# Altium PCB Hedgehog.PcbDoc
Units mm, origin at the board's own origin, x right, y up, seen from the top; angles counter-clockwise.
Board outline 90 x 75 mm, 2 copper layers (Top Layer, Bottom Layer); 72 components, 60 nets, 226 pads, 276 vias.
Unrouted connection lines stored in the file: 5.
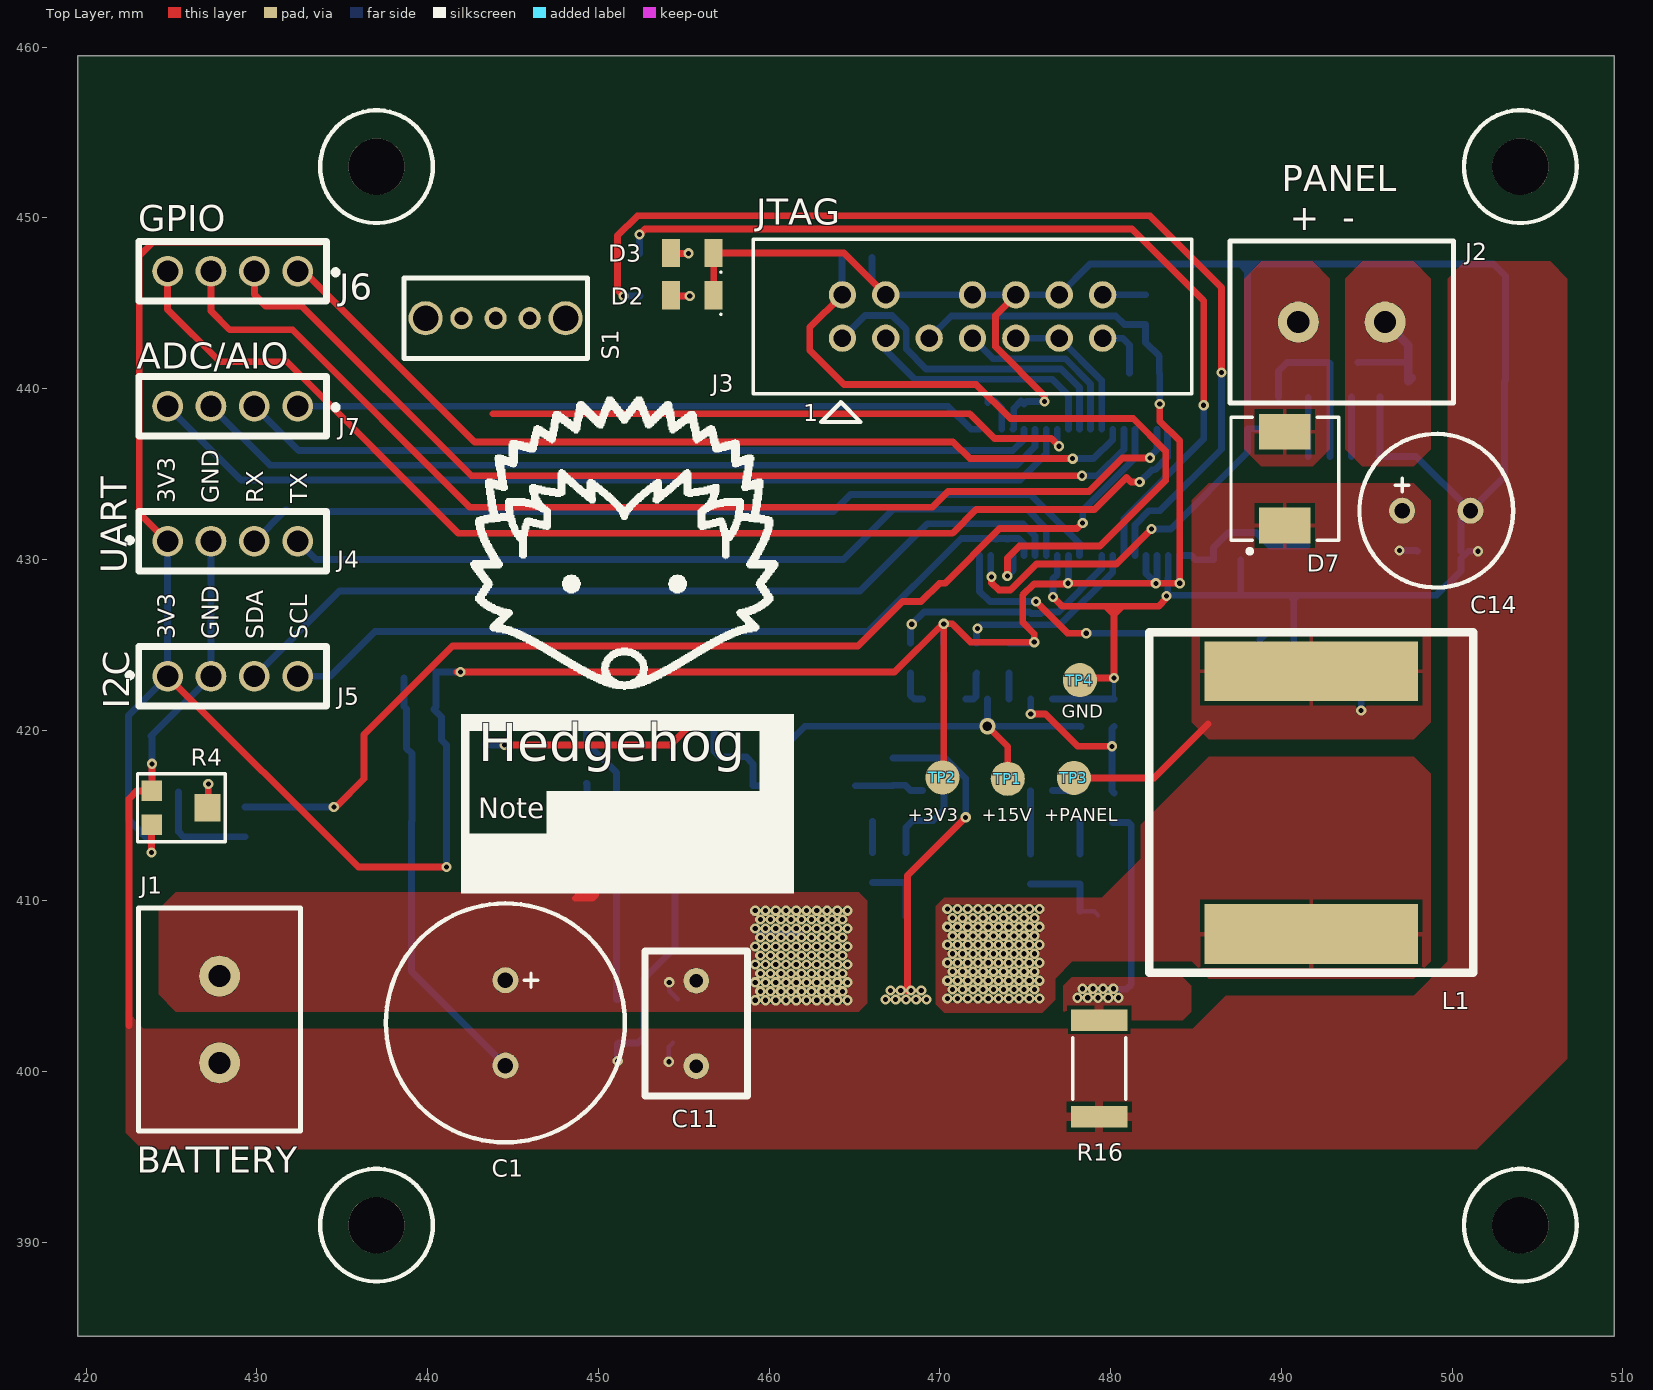
[diagram p0: Top Layer view]
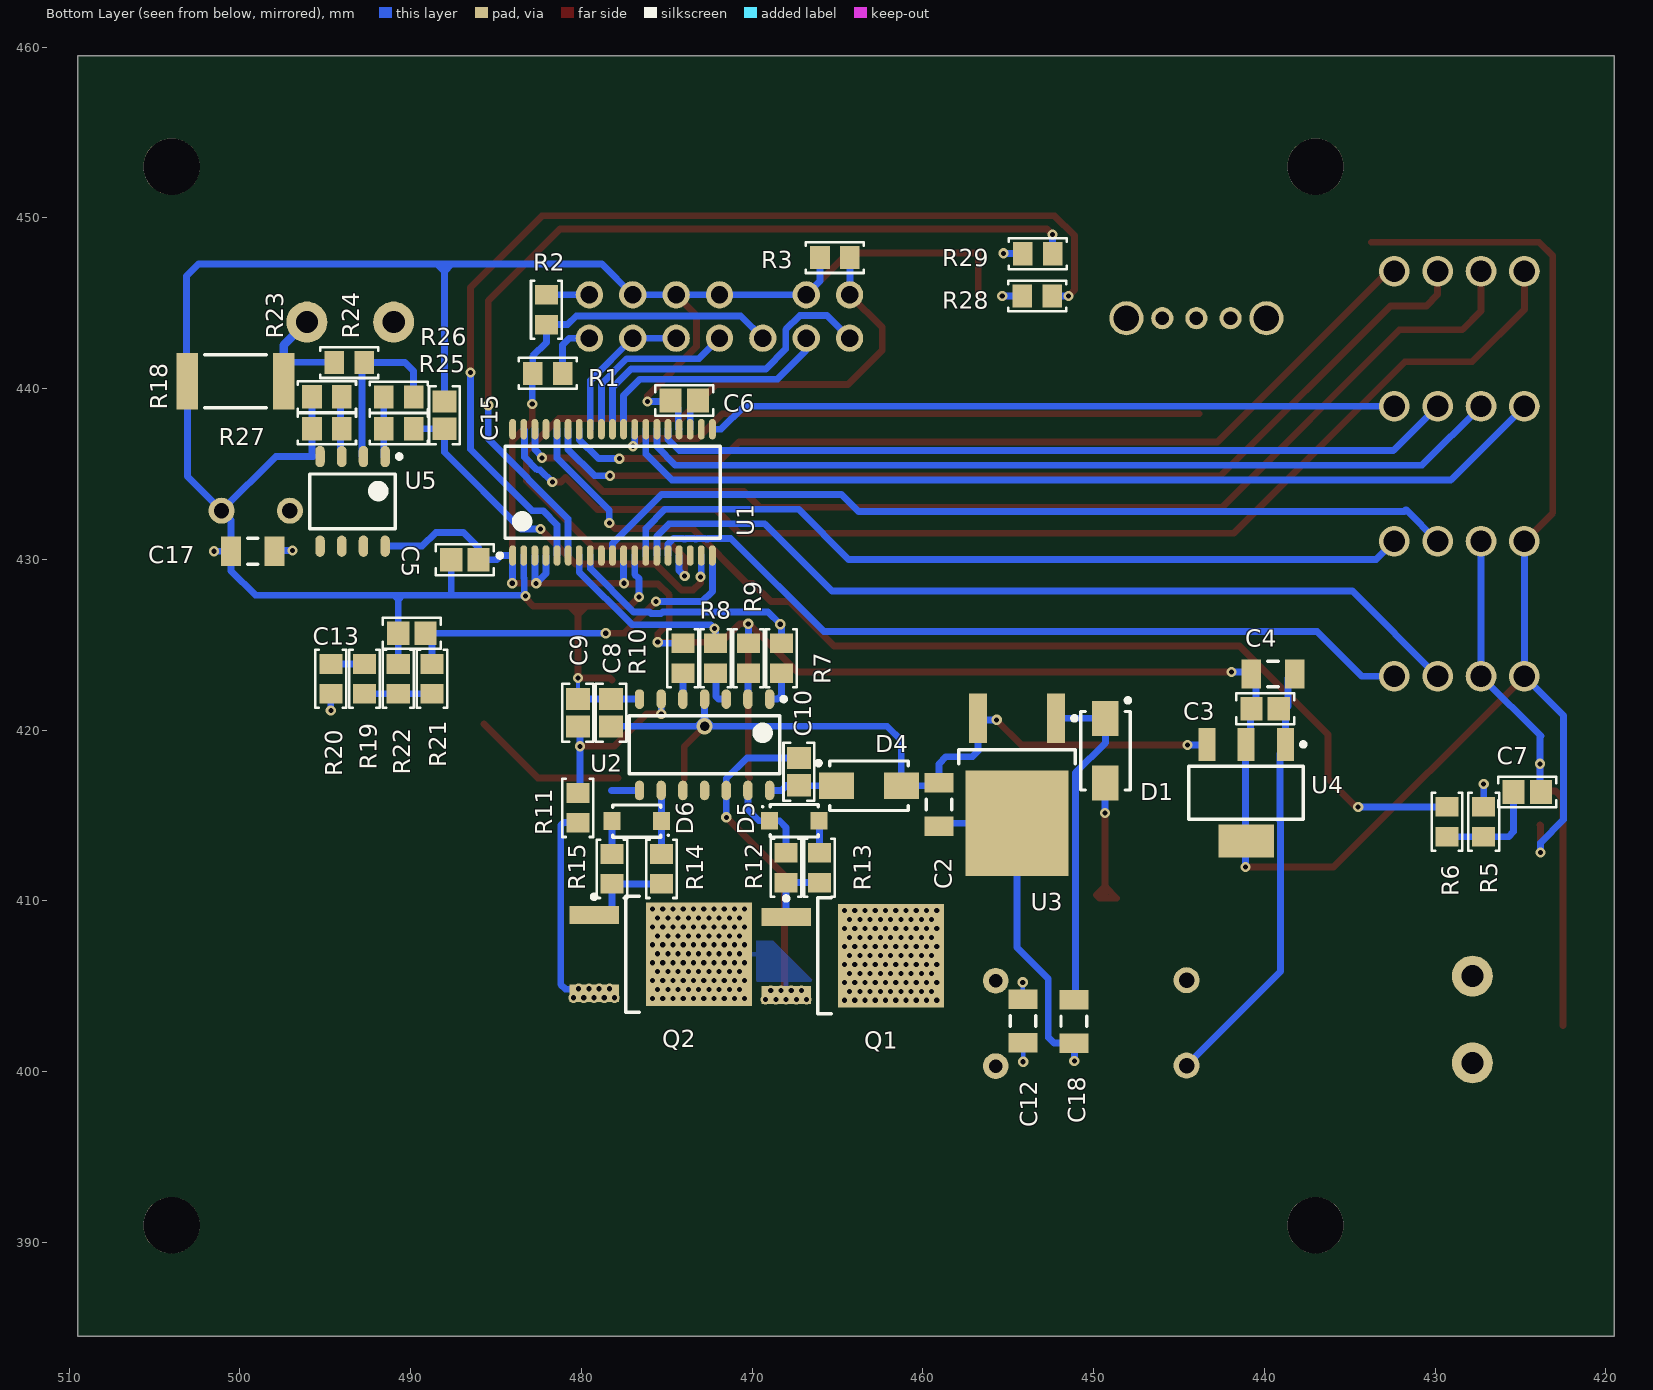
[diagram p1: Bottom Layer view, seen from below]
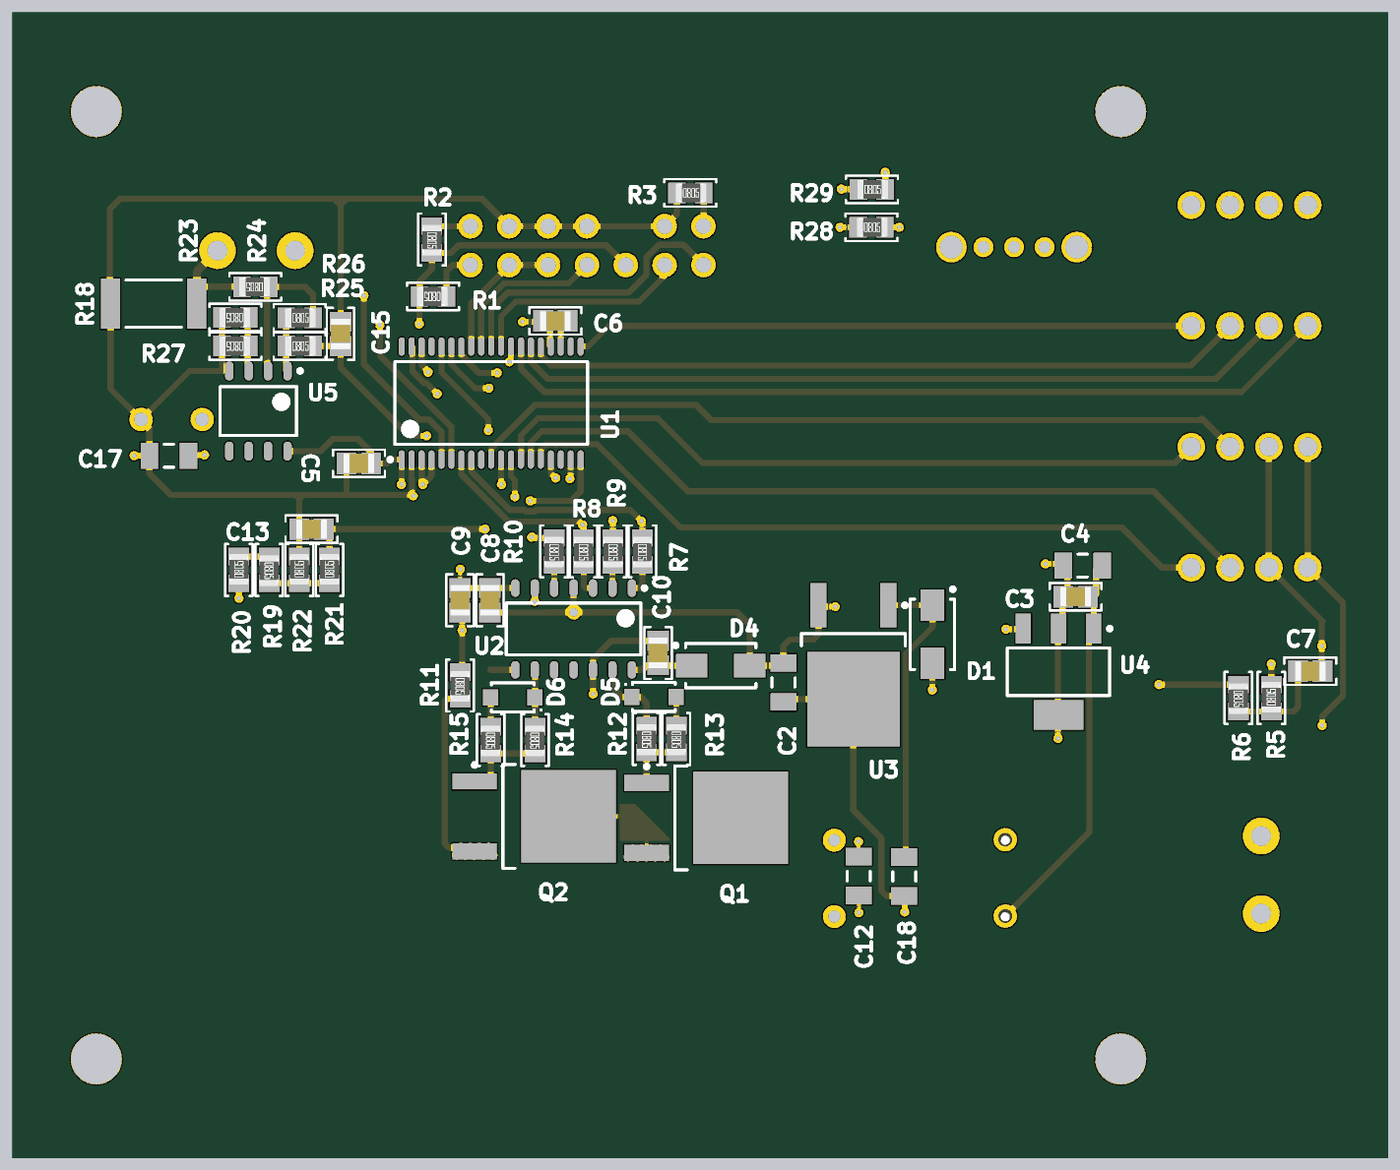
[diagram p2: 3D render of the assembled board from below, using the file's embedded part models]

## Layer stack, top to bottom
Top Solder: solder mask 0.0102, Solder Resist, Dk 3.5
Top Layer: signal copper 0.0356
Dielectric 1: dielectric 0.32, FR-4, Dk 4.8
Bottom Layer: signal copper 0.0356
Bottom Solder: solder mask 0.0102, Solder Resist, Dk 3.5

## Board outline
419.5,384.5 509.5,384.5 509.5,459.5 419.5,459.5

## Design rules (kind name [scope] priority, off if disabled: settings)
Clearance [All] p1: gap=0.2 ignorepadtopadclearanceinfootprint=FALSE
HoleToHoleClearance [All] p1: gap=0.15 allowstackedmicrovias=TRUE
MinimumSolderMaskSliver [All] p1: minsoldermaskwidth=0.01
NetAntennae [All] p1: netantennaetolerance=1000
PlaneConnect [All] p1: planeconnectstyle=Relief reliefexpansion=0.508 reliefentries=4 reliefconductorwidth=0.254 reliefairgap=0
PolygonConnect PolygonConnect_1 [All vs HasFootprint('RES 2512/6432')] p1: connectstyle=Relief reliefconductorwidth=0.508 reliefentries=4 polygonreliefangle="90 Angle" airgapwidth=0.254
PolygonConnect [All] p2: thpad.connectstyle=Relief thpad.reliefconductorwidth=0.254 thpad.reliefentries=4 thpad.polygonreliefangle="90 Angle" thpad.airgapwidth=0 smdpad.connectstyle=Relief smdpad.reliefconductorwidth=0.254 smdpad.reliefentries=4 smdpad.polygonreliefangle="90 Angle" smdpad.airgapwidth=0.254 via.connectstyle=Relief via.reliefconductorwidth=0.254 via.reliefentries=4 via.polygonreliefangle="90 Angle" via.airgapwidth=0
RoutingVias [All] p1: holewidth=0.711 width=1.27 viastyle="Through Hole" minholewidth=0.711 minwidth=1.27 maxholewidth=0.711 maxwidth=1.27
SilkToSilkClearance [All] p1: silktosilkclearance=0
SilkToSolderMaskClearance [IsPad] p1: minsilkscreentomaskgap=0.01 clearancetoexposedcopper=TRUE
SolderMaskExpansion [All] p1: expansion=0.102
Width [All] p1: maxlimit=1 minlimit=0.15 preferedwidth=0.4
24 further rules are at their usual default settings.

## Components (designator, comment, footprint, x,y, rotation, side; value= is the part's Value field where it differs from the comment)
C1 "200u" CAP-200uF-1000V-20%-THM-Radial 444.55,405.35 r270 top value=200uF
C2 "10u" "CAP 1206/3216 Murata" 459.059,415.64 r270 bottom value=10uF
C3 "100n" "CAP 0805/2012" 439.95,421.25 r0 bottom value=100nF
C4 "10u" "CAP 1206/3216 Murata" 439.491,423.285 r180 bottom value=10uF
C5 "100n" "CAP 0805/2012" 486.825,429.975 r180 bottom value=100nF
C6 "2.2u" "CAP 0805/2012" 473.975,439.3 r180 bottom value=2.2uF
C7 "100n" "CAP 0805/2012" 424.6,416.375 r0 bottom value=100nF
C8 "100n" "CAP 0805/2012" 478.259,421.015 r90 bottom value=100nF
C9 "470p" "CAP 0805/2012" 480.209,421.015 r270 bottom value=470pF
C10 "1u" "CAP 0805/2012" 467.259,417.565 r270 bottom value=1uF
C11 "1u" CAP-TH-Radial_1uF-Non_Polarised-KEMET 455.729,400.32 r90 top value=1uF
C12 "1u" "CAP 1206/3216 Murata" 454.134,402.965 r90 bottom value=1uF
C13 "100n" "CAP 0805/2012" 489.925,425.675 r180 bottom value=100nF
C14 "100u" "CAP-100uF-50V-20%-THM-Radial Panasonic Electronic Components" 497.075,432.85 r0 top value=100uF
C15 "100n" "CAP 0805/2012" 488.025,438.45 r90 bottom value=100nF
C17 "1u" "CAP 1206/3216 Murata" 499.25,430.475 r180 bottom value=1uF
C18 "1u" "CAP 1206/3216 Murata" 451.159,402.94 r90 bottom value=1uF
D1 "400V-1A-GenPurp-SMA" "SMA Diodes Incorporated" 449.309,418.79 r270 bottom
D2 "LED-Green-1206" "LED 1206/3216 Kingbright" 455.5,445.475 r180 top
D3 "LED-Red-1206" "LED 1206/3216 Kingbright" 455.5,447.95 r180 top
D4 "400V-2A-Fast-SMA" "SMA Diodes Incorporated" 463.159,416.74 r180 bottom
D5 "20V-1A-SCHOTTKY-SOD123W" "CFP3-SOD123W-Nexperia USA Inc." 467.534,414.69 r180 bottom
D6 "20V-1A-SCHOTTKY-SOD123W" "CFP3-SOD123W-Nexperia USA Inc." 476.759,414.665 r0 bottom
D7 "40V-5A-SCHOTTKY-SMC" DIOM6959X25L 490.2,434.725 r90 top
J1 "Circuit" "TWO_PIN_CONNECTOR-15A-On Shore Technology Inc." 427.809,400.51 r90 top
J2 "Circuit" "TWO_PIN_CONNECTOR-15A-On Shore Technology Inc." 490.995,443.9 r0 top
J3 "JTAG" "14PIN-CONNECTOR-2.54MMX2.54MMPITCH ON SHORE TECHNOLOGY INC." 479.53,442.955 r90 top
J4 "UART" "4Pin_Connector-Wurth Electronics Inc." 424.766,431.06 r0 top
J5 "I2C" "4Pin_Connector-Wurth Electronics Inc." 424.766,423.153 r0 top
J6 "GPIO" "4Pin_Connector-Wurth Electronics Inc." 432.385,446.875 r180 top
J7 "ADC/AIO" "4Pin_Connector-Wurth Electronics Inc." 432.385,438.968 r180 top
L1 "82uH" "Inductor-82uH-Pulse Electronics Power" 491.75,408.05 r180 top
Q1 "40V" "DPAK/TO252-3-5.46mmWidth(Tab) ON Semiconductor - VIAS" 464.109,406.775 r180 bottom
Q2 "40V" "DPAK/TO252-3-5.46mmWidth(Tab) ON Semiconductor - VIAS" 475.359,406.875 r180 bottom
R1 "10k" "RES 0805/2012" 481.975,440.9 r0 bottom value="10k Ohm"
R2 "10k" "RES 0805/2012" 482.05,444.625 r270 bottom value="10k Ohm"
R3 "10k" "RES 0805/2012" 465.15,447.675 r180 bottom value="10k Ohm"
R4 "10K" "Potentiometer-TC33X-2-103E-Bourns Inc." 427.1,415.45 r270 top
R5 "1k" "RES 0805/2012" 427.15,414.625 r90 bottom value="1k Ohm"
R6 "0R" "RES 0805/2012" 429.3,414.625 r270 bottom value="0 Ohm"
R7 "1k" "RES 0805/2012" 468.284,424.215 r270 bottom value="1k Ohm"
R8 "1k" "RES 0805/2012" 472.134,424.215 r270 bottom value="1k Ohm"
R9 "10k" "RES 0805/2012" 470.209,424.215 r270 bottom value="10k Ohm"
R10 "10k" "RES 0805/2012" 474.059,424.215 r270 bottom value="10k Ohm"
R11 "1k" "RES 0805/2012" 480.209,415.44 r270 bottom value="1k Ohm"
R12 "22" "RES 0805/2012" 468.009,411.94 r270 bottom value="22 Ohm"
R13 "22" "RES 0805/2012" 466.059,411.94 r270 bottom value="22 Ohm"
R14 "22" "RES 0805/2012" 475.309,411.865 r270 bottom value="22 Ohm"
R15 "22" "RES 0805/2012" 478.209,411.865 r270 bottom value="22 Ohm"
R16 "0R05" "RES 2512/6432" 479.325,400.175 r90 top value="0.05 Ohm"
R18 "0R05" "RES 2512/6432" 500.25,440.425 r180 bottom value="0.05 Ohm"
R19 "68k" "RES 0805/2012" 492.7,423 r270 bottom value="68k Ohm"
R20 "22k" "RES 0805/2012" 494.675,423 r90 bottom value="22k Ohm"
R21 "10" "RES 0805/2012" 488.75,423 r90 bottom value="10 Ohm"
R22 "10k" "RES 0805/2012" 490.725,423 r90 bottom value="10k Ohm"
R23 "10k" "RES 0805/2012" 494.9,439.525 r0 bottom value="10k Ohm"
R24 "10k" "RES 0805/2012" 493.6,441.525 r0 bottom value="10k Ohm"
R25 "10" "RES 0805/2012" 490.7,437.65 r180 bottom value="10 Ohm"
R26 "100k" "RES 0805/2012" 490.7,439.5 r180 bottom value="100k Ohm"
R27 "100k" "RES 0805/2012" 494.9,437.65 r0 bottom value="100k Ohm"
R28 "330" "RES 0805/2012" 453.3,445.425 r180 bottom value="330 Ohm"
R29 "330" "RES 0805/2012" 453.275,447.9 r180 bottom value="330 Ohm"
S1 "SPDT" Toggle_Switch-SPDT-C&K 439.875,444.125 r0 top
TP1 "TP_2mm_round" TP_2mm_round 473.975,417.15 r0 top
TP2 "TP_2mm_round" TP_2mm_round 470.15,417.225 r0 top
TP3 "TP_2mm_round" TP_2mm_round 477.85,417.2 r0 top
TP4 "TP_2mm_round" TP_2mm_round 478.2,422.925 r0 top
U1 "TMS320F28023DAT" "38TSSOP-6.1mmWidth Texas Instruments" 478.175,433.925 r90 bottom
U2 "FAN7384MX" "14SOIC-3.9mmWidth ON Semiconductor" 472.784,419.14 r270 bottom locked
U3 "15V" "DPAK/TO252-3-5.46mmWidth(Tab) ON Semiconductor" 454.484,416.79 r270 bottom
U4 "Voltage Regulator" "SOT223/TO261-4 Diodes Incorporated" 441.066,416.335 r270 bottom
U5 "OpAmp" 8SOIC-3.9mmWidth 493.4,433.4 r270 bottom

## Footprints (in the part's own frame and the unit in brackets; to place one, negate y for a bottom-side part, rotate by r counter-clockwise, add the part's x,y. Pads: shape width x height; smd on the part's side, far side on the other; paste and mask are expansions set on the pad)
"4Pin_Connector-Wurth Electronics Inc." [mm] "Pitch 2.54mm-1.15mmWidth-Wurth Electronics Inc."
  round 1.8 hole 1.25: 1(0,0) 2(2.54,0) 3(5.08,0) 4(7.62,0)
  silkscreen extent -2.37,-1.75 9.31,1.75
8SOIC-3.9mmWidth [mm] "SOIC, 8-Leads, Body 4.90x3.90mm, Pitch 1.27mm, IPC High Density"
  oval 1.25x0.55 smd: 1(-2.625,1.905) 2(-2.625,0.635) 3(-2.625,-0.635) 4(-2.625,-1.905) 5(2.625,-1.905) 6(2.625,-0.635) 7(2.625,0.635) 8(2.625,1.905)
  silkscreen extent -2.75,-2.5 1.6,2.85, body extent -2,-2.5 2,2.5, height 1.65
"14PIN-CONNECTOR-2.54MMX2.54MMPITCH ON SHORE TECHNOLOGY INC." [mm] "14Pin-Connector-2.54mmx2.54mmPitch"
  round 1.6 hole 1.02: 1(0,15.24) 2(2.54,15.24) 3(0,12.7) 4(2.54,12.7) 5(0,10.16) 7(0,7.62) 8(2.54,7.62) 9(0,5.08) 10(2.54,5.08) 11(0,2.54) 12(2.54,2.54) 13(0,0) 14(2.54,0)
  silkscreen extent -3.25,-5.22 5.79,20.46
"14SOIC-3.9mmWidth ON Semiconductor" [mm] "SOIC, 14-Leads, Body 8.56x3.98mm, Pitch 1.27mm, IPC High Density"
  oval 1.15x0.55 smd: 1(-2.675,3.81) 2(-2.675,2.54) 3(-2.675,1.27) 4(-2.675,0) 5(-2.675,-1.27) 6(-2.675,-2.54) 7(-2.675,-3.81) 8(2.675,-3.81) 9(2.675,-2.54) 10(2.675,-1.27) 11(2.675,0) 12(2.675,1.27) 13(2.675,2.54) 14(2.675,3.81)
  silkscreen extent -2.8,-4.4 1.7,4.76, body extent -2.1,-4.4 2.1,4.4, height 1.65
"38TSSOP-6.1mmWidth Texas Instruments" [mm] "TSOP, 38-Leads, Body 12.50x6.10mm, Pitch 0.65mm, IPC High Density"
  oval 1.2x0.4 smd: 1(-3.7,5.85) 2(-3.7,5.2) 3(-3.7,4.55) 4(-3.7,3.9) 5(-3.7,3.25) 6(-3.7,2.6) 7(-3.7,1.95) 8(-3.7,1.3) 9(-3.7,0.65) 10(-3.7,0) 11(-3.7,-0.65) 12(-3.7,-1.3) 13(-3.7,-1.95) 14(-3.7,-2.6) 15(-3.7,-3.25) 16(-3.7,-3.9) 17(-3.7,-4.55) 18(-3.7,-5.2) 19(-3.7,-5.85) 20(3.7,-5.85) 21(3.7,-5.2) 22(3.7,-4.55) 23(3.7,-3.9) 24(3.7,-3.25) 25(3.7,-2.6) 26(3.7,-1.95) 27(3.7,-1.3) 28(3.7,-0.65) 29(3.7,0) 30(3.7,0.65) 31(3.7,1.3) 32(3.7,1.95) 33(3.7,2.6) 34(3.7,3.25) 35(3.7,3.9) 36(3.7,4.55) 37(3.7,5.2) 38(3.7,5.85)
  silkscreen extent -3.82,-6.3 2.7,6.73, body extent -3.1,-6.3 3.1,6.3, height 1.2
"CAP 0805/2012" [mm] "Chip Capacitor, 2-Leads, Body 2.00x1.20mm, IPC Medium Density"
  rect 1.3x1.4 smd: 1(-0.8,0) 2(0.8,0)
  silkscreen extent -1.7,-0.9 1.7,0.9, body extent -1,-0.64 1,0.64, height 1.26
"CAP 1206/3216 Murata" [mm] "Chip Capacitor, 2-Leads, Body 3.20x1.60mm, IPC High Density"
  rect 1.15x1.7 smd: 1(-1.275,0) 2(1.275,0)
  silkscreen extent -0.3,-0.75 0.3,0.75, body extent -1.7,-0.9 1.7,0.9, height 1.8
"CAP-100uF-50V-20%-THM-Radial Panasonic Electronic Components" [mil] "THM-Radial- Pitch3.5mm"
  round 60 hole 35.43: 1(0,0) 2(157.48,0)
  silkscreen extent -98,-177 256,177
CAP-200uF-1000V-20%-THM-Radial [mil] "THM-Radial- Pitch5mm"
  round 60 hole 35.43: 1(0,0) 2(196.85,0)
  silkscreen extent -177,-276 374,276, body extent -156,-256 356,256, height 1063
CAP-TH-Radial_1uF-Non_Polarised-KEMET [mm] "Radial-Through Hole-5mmPitch-(7.20mm x 5.00mm)"
  round 1.5 hole 0.8: 1(0,0) 2(5,0)
  silkscreen extent -1.75,-3 6.75,3
"CFP3-SOD123W-Nexperia USA Inc." [mm] "SODFL, 2-Leads, Body 1.70x3.50mm, IPC High Density"
  rect 1x1.05 smd: 1(1.45,0) 2(-1.45,0)
  silkscreen extent -1.9,-0.95 1.4,0.95, body extent -1.4,-0.95 1.4,0.95, height 1.1
DIOM6959X25L [mm] "Molded Diode, 2-Leads, Body 6.85x5.90mm, IPC High Density"
  rect 2.1x3 smd: 1(2.75,0) 2(-2.75,0)
  silkscreen extent -4.37,-3.15 3.6,3.15, body extent -3.55,-3.11 3.55,3.11, height 2.5
"DPAK/TO252-3-5.46mmWidth(Tab) ON Semiconductor" [mm] "DPAK/TO252-3-5.46mmWidth(Tab)-6.73mmWidth(Body) ON Semiconductor"
  rect 2.9x1.05 smd: 1(-3.9,2.29) 3(-3.9,-2.29)
  rect 6.2x6.05 smd: 2(2.25,0)
  silkscreen extent -4.02,-3.4 -1.25,3.49, body extent -2.6,-3.37 3.62,3.37, height 2.38
"DPAK/TO252-3-5.46mmWidth(Tab) ON Semiconductor - VIAS" [mm] "DPAK/TO252-3-5.46mmWidth(Tab)-6.73mmWidth(Body) ON Semiconductor"
  rect 2.9x1.05 smd: 1(-3.9,2.29) 3(-3.9,-2.29)
  rect 6.2x6.05 smd: 2(2.25,0)
  silkscreen extent -4.03,-3.4 -1.25,3.49, body extent -2.6,-3.37 3.62,3.37, height 2.38
"Inductor-82uH-Pulse Electronics Power" [mm] "17.8x16.9mm Pulse Electronics Power"
  rect 12.5x3.5 smd: 1(0,0) 2(0,-15.4)
  silkscreen extent -9.5,-17.67 9.5,2.27
"LED 1206/3216 Kingbright" [mm] "SODFL, 2-Leads, Body 1.60x3.20mm, IPC High Density"
  rect 1.05x1.65 smd: 1(1.25,0) 2(-1.25,0)
  silkscreen extent -1.73,1.08 -1.63,1.17, body extent -1.05,-0.85 1.05,0.85, height 0.85
"Potentiometer-TC33X-2-103E-Bourns Inc." [mm] "Rectangular-3.80mm x 3.60mm x 1.20mm"
  rect 1.2x1.2 smd: 1(-1,-3.25) 3(1,-3.25)
  rect 1.6x1.5 smd: 2(0,0)
  silkscreen extent -2,-4.1 2,1.05
"RES 0805/2012" [mm] "Chip Resistor, 2-Leads, Body 2.00x1.25mm, IPC Medium Density"
  rect 1.15x1.35 smd: 1(-0.875,0) 2(0.875,0)
  silkscreen extent -1.7,-0.9 1.7,0.9, body extent -0.95,-0.62 1.05,0.63, height 0.6
"RES 2512/6432" [mm] "Chip Resistor, 2-Leads, Body 6.40x3.20mm, IPC High Density"
  rect 1.25x3.3 smd: 1(-2.825,0) 2(2.825,0)
  silkscreen extent -1.8,-1.55 1.8,1.55, body extent -3.3,-1.7 3.3,1.7, height 0.7
"SMA Diodes Incorporated" [mm] "SODFL, 2-Leads, Body 2.60x5.19mm, IPC High Density"
  rect 2.05x1.55 smd: 1(1.9,0) 2(-1.9,0)
  silkscreen extent -3.07,-1.45 2.3,1.45, body extent -2.3,-1.46 2.3,1.46, height 2.4
"SOT223/TO261-4 Diodes Incorporated" [mm] "SOT223, 4-Leads, Body 6.50x7.00mm (avg), Pitch 2.30mm, IPC High Density"
  rect 1.95x1 smd: 1(-2.825,2.3) 2(-2.825,0) 3(-2.825,-2.3)
  rect 1.95x3.25 smd: 2(2.825,0)
  silkscreen extent -2.95,-3.35 1.55,3.47, body extent -1.85,-3.35 1.85,3.35, height 1.8
Toggle_Switch-SPDT-C&K [mm] "8.6x4.3mm, 2mmPitch"
  round 2 hole 1.5: 0(0,0) 0(8.2,0)
  round 1.3 hole 0.8: 1(2.1,0) 2(4.1,0) 3(6.1,0)
  silkscreen extent -1.28,-2.35 9.48,2.35
TP_2mm_round [mm]
  round 2 smd: 0(0,0)
"TWO_PIN_CONNECTOR-15A-On Shore Technology Inc." [mm] "5.08mmPitch On Shore Technology Inc."
  round 2.4 hole 1.3: 1(0,0) 2(5.08,0)
  silkscreen extent -4,-4.75 9.08,4.75

## Part data
C1: library part 200u-100V-THM-Radial-20%, "Polarized Capacitor, 200uF, 100V Voltage Rating, Through Hole Radial Package", ManufacturerName="United Chemi-Con", ManufacturerReference=EGXF101ELL201MK25S, VoltageRating=100V, Category="Capacitor Polarized", DistributorName=Digikey, DistributorReference=565-4541-ND, Material=Alum, Other="20%, 3000hr, 125C", PackageReference="Through Hole Radial-5mmLeadSpacing"
C2 C4: library part 10u-25V-1206-10%, "Capacitor, 10uF, 25V Voltage Rating, 1206 Package", ManufacturerName=Murata, ManufacturerReference=GRM31CR61E106KA12L, VoltageRating=25V, Category=Capacitor, DistributorName=Digikey, DistributorReference=490-3373-1-ND, InventoryNumber=CAP113, Material=MLCC, Other="10%, X5R", PackageReference=1206
C3: library part 100n-50V-0805-10%, "Capacitor, 100nF, 50V Voltage Rating, 0805 Package", VoltageRating=50V, Category=Capacitor, DistributorName=Digikey, DistributorReference=478-1395-1-ND, InventoryNumber=CAP033, Material=MLCC, Other="10%, X7R", PackageReference=0805
C5 C7 C8 C13 C15: library part 100n-50V-0805-10%, "Capacitor, 100nF, 50V Voltage Rating, 0805 Package", Category=Capacitor, DistributorName=Digikey, DistributorReference=478-1395-1-ND, InventoryNumber=CAP033, Material=MLCC, Other="10%, X7R", PackageReference=0805
C6: library part 2.2u-25V-0805-10%, "Capacitor, 2.2uF, 25V Voltage Rating, 0805 Package", VoltageRating=25V, Category=Capacitor, DistributorName=Digikey, DistributorReference=490-3331-1-ND, InventoryNumber=CAP102, Material=MLCC, Other="10%, X7R", PackageReference=0805
C9: library part 470p-50V-0805-5%, "Capacitor, 470pF, 50V Voltage Rating, 0805 Package", VoltageRating=50V, Category=Capacitor, DistributorName=Digikey, DistributorReference=709-1179-1-ND, InventoryNumber=CAP014, Material=MLCC, Other=5%,C0G, PackageReference=0805
C10: library part 1u-25V-0805-10%, "Capacitor,1uF, 25V Voltage Rating, 0805 Package", VoltageRating=25V, Category=Capacitor, DistributorName=Digikey, DistributorReference=445-1354-1-ND, InventoryNumber=CAP052, Material=MLCC, Other="10%, X7R", PackageReference=0805
C11: library part 1u-63V-THM-Radial-10%, "Capacitor, 1uF, 63V Voltage Rating, RADIAL Package", ManufacturerName=KEMET, ManufacturerReference=R82DC4100AA60J, VoltageRating=63V, Category=Capacitor, DistributorName=Digikey, DistributorReference=399-5860-ND, Material=Polyester, Other=5%, PackageReference=TH-RADIAL-7.2X5.0mm-5mmPitch
C12 C17 C18: library part 1u-50V-1206-10%, "Capacitor, 1uF, 50V Voltage Rating, 1206 Package", ManufacturerName="TDK Corporation", ManufacturerReference=C3216X7R1H105K160AB, VoltageRating=50V, Category=Capacitor, DistributorName=Digikey, DistributorReference=445-1423-1-ND, InventoryNumber=CAP053, Material=MLCC, Other="10%, X7R", PackageReference=1206
C14: library part 100u-50V-THM-Radial-20%, "Polarized Capacitor, 100uF, 50V Voltage Rating, Through Hole Radial Package", ManufacturerName="Panasonic Electronic Components", ManufacturerReference=ECA-1HM101, VoltageRating=50V, Category="Capacitor Polarized", DistributorName=Digikey, DistributorReference=P5182-ND, Material=Alum, Other="20%, 2000hr, 85C", PackageReference="Through Hole Radial-3.5mmLeadSpacing"
D1: "Diode, 400V Voltage Rating, 1A Current Rating, General Purpose Type, SMA Package", Manufacturer="ON Semiconductor", ManufacturerReference=MRA4004T3G, VoltageRating=400V, Distributor=Digikey, DistributorReference=MRA4004T3GOSCT-ND, InventoryNumber=DIODE043, PackageReference=SMA, Type="General Purpose"
D2: "LED, Green Color, 1206 Package", Color=Green, Manufacturer=Kingbright, ManufacturerReference=APT3216SGC, Distributor=Digikey, DistributorReference=754-1141-1-ND, InventoryNumber=DIODE004, PackageReference=1206, Type=LED
D3: "LED, Red Color, 1206 Package", Color=Red, Manufacturer=Kingbright, ManufacturerReference=APT3216SRCPRV, Distributor=Digikey, DistributorReference=754-1142-1-ND, InventoryNumber=DIODE001, PackageReference=1206, Type=LED
D4: "Diode, 400V Voltage Rating, 2A Current Rating, Fast Type, SMA Package", Manufacturer="ON Semiconductor", ManufacturerReference=MURA240T3G, VoltageRating=400V, Distributor=Digikey, DistributorReference=MURA240T3GOSCT-ND, InventoryNumber=DIODE050, PackageReference=SMA, Type=Fast
D5 D6: "Diode, 20V Voltage Rating, 1A Current Rating, SCHOTTKY Type, SOD123W Package", Manufacturer="Nexperia USA Inc.", ManufacturerReference=PMEG2010ER,115, VoltageRating=20V, Distributor=Digikey, DistributorReference=1727-5192-1-ND, PackageReference=CFP3-SOD123W, Type=SCHOTTKY
D7: "Diode, 40V Voltage Rating, 5A Current Rating, SCHOTTKY Type, SMC Package", Manufacturer="Diodes Incorporated", ManufacturerReference=B540C-13-F, VoltageRating=40V, Distributor=Digikey, DistributorReference=B540C-FDICT-ND, PackageReference=SMC, Type=SCHOTTKY
J1 J2: library part TwoPin-Connector-15A-300V-THM, "Slide Toggle Switch, 300V Voltage Rating, 15A Current Rating,", CurrentRating=15A, Manufacturer="On Shore Technology Inc.", ManufacturerReference=OSTTA024163, Package=5.08mmPitch, VoltageRating=300V, Distributor=Digikey, DistributorReference=ED2580-ND, InventoryNumber=SC037
J3: library part 14Pin-Connector, "14Pin-Connector", CurrentRating=3A, Manufacturer="On Shore Technology Inc.", ManufacturerReference=302-S141, VoltageRating=250V, Distributor=Digikey, DistributorReference=ED10522-ND, InventoryNumber=SC043
J4 J5 J6 J7: library part 4Pin-Connector, "4Pin-Connector", Distributor=Digikey
L1: library part 82uH-6.5A-83mOhm, "82u, 6.5A Current Rating, 83mOhm Resistance, ThroughHole Package", CurrentRating=6.5A, ManufacturerName="Pulse Electronics Power", ManufacturerReference=PA4344.823ANLT, Resistance=83mOhm, Category=Inductor, DistributorName=Digikey, DistributorReference=553-4038-1-ND, Other=20%
Q1 Q2: library part Mosfet-40V-6A-1.71W-SMD-DPAK, "N-CH, 40V Voltage Rating, 6A Current Rating,  1.71W Power Rating, DPAK Package", CurrentRating=6A, ManufacturerReference="Diodes Incorporated", Package=DPAK/TO252-3, PowerRating=1.71W, DistributorName=Digikey, DistributorReference=DMN4040SK3-13DICT-ND, Manfacturer="Diodes Incorporated", Material="METAL OXIDE", Type=N-Channel, VoltageRating=40V
R1 R2 R3 R9 R10 R22 R23 R24: library part 10k-125mW-0805-1%, "Resistor, 10k, 125mW Power Rating, 0805 Package", ManufacturerReference=MCR10EZPF1002, PowerRating=125mWatt, Category=Resistor, DistributorName=Digikey, DistributorReference=RHM10.0KCRCT-ND, InventoryNumber=RES038, Other=1%, PackageReference=0805
R4: library part Pot-10kOhm-0.1W-20%, "Potentiometer, 10kOhm Resistance, Current Rating, 0.1W Power Rating", Manufacturer="Bourns Inc.", ManufacturerReference=TC33X-2-103E, PowerRating=.1W, Distributor=Digikey, DistributorReference=TC33X-103ECT-ND, Other=25%
R5 R7 R8 R11: library part 1k-125mW-0805-1%, "Resistor, 1k, 125mW Power Rating, 0805 Package", ManufacturerReference=MCR10EZHF1001, PowerRating=125mWatt, Category=Resistor, DistributorName=Digikey, DistributorReference=RHM1.00KCCT-ND, InventoryNumber=RES020, Other=1%, PackageReference=0805
R6: library part 0k-125mW-0805-Jumper, "Resistor, 0 , 125mW Power Rating, 0805 Package", ManufacturerReference=MCR10EZPJ000, PowerRating=125mWatt, Category=Resistor, DistributorName=Digikey, DistributorReference=RHM0.0ARCT-ND, InventoryNumber=RES001, Other=JUMPER, PackageReference=0805
R12 R13 R14 R15: library part 22-125mW-0805-1%, "Resistor, 22, 125mW Power Rating, 0805 Package", ManufacturerReference=RC0805FR-0722RL, PowerRating=125mWatt, Category=Resistor, DistributorName=Digikey, DistributorReference=311-22.0CRCT-ND, InventoryNumber=RES007, Other=1%, PackageReference=0805
R16 R18: library part RES-0.05-3W-SMD-2512-1%, "Resistor, 0.05 Ohm, 3W Power Rating, 2512 Package", ManufacturerName="Bourns Inc.", ManufacturerReference=CRA2512-FZ-R050ELF, PowerRating=3Watt, Category=Resistor, DistributorName=Digikey, DistributorReference=CRA2512-FZ-R050ELFCT-ND, Other=1%, PackageReference=2512
R19: library part 68k-125mW-0805-1%, "Resistor, 68k, 125mW Power Rating, Package", ManufacturerReference=MCR10EZPF6802, PowerRating=125mW, Category=Resistor, DistributorName=Digikey, DistributorReference=RHM68.0KCRTR-ND, InventoryNumber=RES050, Other=5%, PackageReference=0805
R20: library part 22k-125mW-0805-1%, "Resistor, 22k, 125mW Power Rating, 0805 Package", ManufacturerReference=RMCF0805FT22K0, PowerRating=125mWatt, Category=Resistor, DistributorName=Digikey, DistributorReference=RMCF0805FT22K0CT-ND, InventoryNumber=RES044, Other=1%, PackageReference=0805
R21 R25: library part 10-125mW-0805-1%, "Resistor, 10, 125mW Power Rating, 0805 Package", ManufacturerReference=MCR10EZHF10R0, PowerRating=125mWatt, Category=Resistor, DistributorName=Digikey, DistributorReference=RHM10.0CCT-ND, InventoryNumber=RES005, Other=1%, PackageReference=0805
R26 R27: library part 100k-125mW-0805-1%, "Resistor, 100k, 125mW Power Rating, 0805 Package", ManufacturerReference=MCR10EZPF1003, PowerRating=125mWatt, Category=Resistor, DistributorName=Digikey, DistributorReference=RHM100KCRCT-ND, InventoryNumber=RES052, Other=1%, PackageReference=0805
R28 R29: library part 330-125mW-0805-1%, "Resistor, 330, 125mW Power Rating, 0805 Package", ManufacturerReference=MCR10EZPF3300, PowerRating=125mWatt, Category=Resistor, DistributorName=Digikey, DistributorReference=RHM330CRCT-ND, InventoryNumber=RES014, Other=1%, PackageReference=0805
S1: library part ToggleSwitch-SPDT-12V-100mA, "Slide Toggle Switch, 12V Voltage Rating, 100mA Current Rating, Through Hole Package", CurrentRating=100mA, Manufacturer=C&K, ManufacturerReference=OS102011MS2QN1, VoltageRating=12V, Circuit=SPDT, Distributor=Digikey, DistributorReference=CKN9565-ND
U1: library part MC-TMS320F28023DAT_Modified, "IC MCU 32BIT 64KB FLASH 38TSSOP", Manufacturer="Texas Instruments", Package=38TSSOP-6.1mmWidth, Distributor=Digikey, DistributorReference=296-27220-ND, ManufacturerReference=TMS320F28023DAT
U2: "Half-Bridge Gate Driver IC Non-Inverting 14-SOIC", Manufacturer="ON Semiconductor", Distributor=Digikey, DistributorReference=FAN7384MXCT-ND, InventoryNumber=IC103, ManufacturerReference=FAN7384MX, PackageReference=14-SOIC-3.9mmWidth
U3: library part 15V-1A-LDO-SMD-DPAK, "Voltage Regulator, 15V OutputVoltage, 1A MaxCurrent, LDO Type, DPAK Package", CurrentRating=1A, InputVoltageRating=35V, Manufacturer="ON Semiconductor", ManufacturerReference=MC7815CDTG, Package=DPAK/TO252-3, Distributor=Digikey, DistributorReference=MC7815CDTGOS-ND, OutputVoltage=15V, Type=LDO
U4: library part 3.3V-1A-LDO-SMD-SOT223_2, "Voltage Regulator, 3.3V OutputVoltage, 1A MaxCurrent, LDO Type, SOT223 Package", CurrentRating=1A, InputVoltageRating=18V, Manufacturer="Diodes Incorporated", ManufacturerReference=ZLDO1117G33TA, OutputVoltage=3.3V, Package=SOT223/TO261-4, Distributor=Digikey, DistributorReference=ZLDO1117G33DICT-ND, InventoryNumber=IC013, Type=LDO
U5: library part LM358AD, "IC OPAMP GP 700KHZ 8SOIC", Manufacturer="Texas Instruments", Distributor=Digikey, DistributorReference=296-9553-5-ND, InventoryNumber=IC212, ManufacturerReference=LM358AD, PackageReference=8SOIC-3.9mmWidth

## Free pads (board coordinates)
  round 3.302 hole 3.302: 3(437,391) 3(437,453) 3(504,391) 3(504,453)

## Via types
v1: diameter 0.6, hole 0.3, Top Layer to Bottom Layer, 275 vias
v2: diameter 0.94, hole 0.559, Top Layer to Bottom Layer, 1 vias

## Nets (pads, with @x,y where several pads share a name; then routed paths per layer and width w, separated by ;. In a path a pad name is that pad's centre, name@x,y a point inside that pad or via, vN(x,y) a via of type N, cw(c..) or ccw(c..) an arc to the next point about the centre after c; other vN are vias at no path point)
+3V3_VCC: C3.2 C4.1 C5.2 J3.5 J4.1 J5.1 R1.2 R2.2 R4.3 R9.1 R10.1 S1.1 TP2.0 U1.1 U1.3 U1.4 U1.11 U4.2 U5.8 | length 188.7
  Top Layer w0.4: v1(423.825,412.825) 423.825,414.425 R4.3 ; J5.1 435.944,411.975 v1(441.1,411.975) ; J4.1 423.1,432.726 423.1,447.775 423.9,448.575 433.725,448.575 ; v1@441.7,423.4 v1(441.925,423.4) 467.35,423.4 470.225,426.275 v1(470.225,426.225) ; TP2.0 470.225,417.3 v1(470.225,426.225) ; v1@477.5,428.525 477.538,428.563 475.513,428.563 474.85,427.9 474.85,426.318 475.525,425.643 v1(475.525,425.15) 471.8,425.15 470.725,426.225 v1(470.225,426.225) ; v1@477.5,428.675 v1(477.5,428.6) v1@484,428.6 ; v1(482.875,439.1) 482.875,438.1 484.05,436.925 v1(484.05,428.6)
  Bottom Layer w0.4: v1(423.825,412.825) 423.825,413.4 422.475,414.75 422.475,420.862 J5.1 J4.1 ; v1(441.1,411.975) 441.1,419.126 441.066,419.16 440.8,419.426 440.8,420.775 440.366,421.209 440.366,421.235 440.481,421.35 440.481,423.4 v1@441.7,423.4 ; J3.5 470.665,444.25 480.3,444.25 480.8,443.75 R2.2 482.05,442.7 482.85,441.9 R1.2 482.875,440.875 v1(482.875,439.1) ; R9.1 470.209,426.209 v1(470.225,426.225) ; R10.1 475.465,425.09 v1(475.525,425.15) ; v1(477.5,428.6) 477.525,428.625 U1.11 ; U1.4 482.075,429.169 v1(482.649,428.596) 482.671,428.596 482.725,428.65 U1.3 ; v1(484.05,428.6) 484.025,428.625 U1.1 484.725,430.225 484.975,429.975 C5.2 486.025,430.7 486.9,431.575 488.525,431.575 489.325,430.775 U5.8
+15V_VCC: C2.1 C8.1 D4.1 TP1.0 U2.4 U3.3 U4.3 | length 48
  Top Layer w0.4: v1(444.5,419.125) 454.225,419.125 455.7,420.6 v1(455.675,420.6) ; v2(472.775,420.225) 473.975,419.025 TP1.0
  Bottom Layer w0.4: U4.3 443.401,419.125 v1(444.5,419.125) ; v1(455.675,420.6) 456.734,420.6 456.759,420.625 456.759,418.765 457.084,418.44 458.634,418.44 459.059,418.015 C2.1 459.059,416.74 D4.1 461.259,419.384 462.1,420.225 v2@472.344,420.225 ; U2.4 v2@472.784,420.665 ; C8.1 v2@473.224,420.225 ; v2@472.344,420.225 v2(472.775,420.225) v2@473.224,420.225 ; v2@472.344,420.225 v2@472.784,420.665 ; v2@472.784,420.665 v2@473.224,420.225
ADCINA2: J7.1 U1.20 | length 40.5
  Bottom Layer w0.4: J7.1 470.482,438.968 471.825,437.625 U1.20
ADCINB2: J7.2 U1.24 | length 47
  Bottom Layer w0.4: J7.2 432.445,436.368 474.266,436.368 474.925,437.026 U1.24
ADCINB4: J7.3 U1.25 | length 51.2
  Bottom Layer w0.4: J7.3 430.756,435.517 ; 430.756,435.511 474.486,435.511 475.575,436.6 U1.25
ADCINB6: J7.4 U1.26 | length 55.3
  Bottom Layer w0.4: J7.4 429.077,434.656 ; 429.077,434.654 474.704,434.654 476.225,436.175 U1.26
AMP_-IN: R24.1 R26.2 U5.2 | length 10.2
  Bottom Layer w0.254: R24.1 492.8,441.525 R24.1@492.84,441.485
  Bottom Layer w0.4: R26.2 489.825,441.025 490.325,441.525 R24.1 ; U5.2@492.84,436.025 R24.1@492.84,441.485
AMP_IN+: R23.1 R27.1 U5.3 | length 3.5
  Bottom Layer w0.254: R27.1@494.1,437.65 R27.1@494.11,437.64
  Bottom Layer w0.4: R27.1@494.1,437.65 R23.1@494.1,439.525 ; U5.3@494.11,436.025 R27.1@494.11,437.64
CSC: C9.2 R11.1 U2.6 | length 10.4
  Top Layer w0.4: v1(475.323,420.946) 476.194,420.946 478.089,419.05 v1(480.075,419.05)
  Bottom Layer w0.4: v1(475.323,420.946) U2.6 ; R11.1 480.075,416.449 v1(480.075,419.05) 480.075,420.081 C9.2
CURRENT_SENSOR: C15.1 R25.2 U1.18 | length 23.3
  Top Layer w0.4: v1(473.025,428.975) 473.025,428.625 473.45,428.2 474.125,428.2 475.65,429.725 480.35,429.725 v1(482.4,431.775)
  Bottom Layer w0.4: v1@472.975,428.975 U1.18 ; v1(482.4,431.775) 483.525,431.775 488.025,436.275 C15.1 R25.2
FO: R10.2 U2.5 | length 1.5
  Bottom Layer w0.254: R10.2@474.054,423.335 R10.2
  Bottom Layer w0.4: U2.5 R10.2@474.054,423.335
GND: C1.2 C2.2 C3.1 C4.2 C5.1 C6.1 C7.1 C8.2 C9.1 C11.1 C12.1 C13.1 C14.2 C15.2 C17.1 C18.1 D2.2 D3.2 J1.1 J3.4 J3.8 J3.10 J3.12 J4.2 J5.2 R3.1 R4.1 R16.1 R18.1 R22.2 R23.2 R27.2 S1.3 TP4.0 U1.2 U1.12 U1.23 U2.7 U3.2 U4.1 U5.4 | length 232.7
  Top Layer w0.4: 422.5,402.7 422.5,415.975 422.95,416.425 423.825,416.425 R4.1 423.825,416.475 423.85,416.5 v1(423.85,418.025) ; D2.2 D3.2 464.375,447.95 J3.4 ; J3.10 473.25,444.295 473.25,442.458 476.125,439.583 v1(476.125,439.25) ; v1(476.625,427.8) 477.175,427.25 479.725,427.25 ; TP4.0 478.325,423.05 v1(480.2,423.05) 480.2,426.65 480.209,426.659 ; v1(483.275,427.85) 483.275,427.725 482.8,427.25 480.675,427.25 ; 479.725,427.25 480.2,426.775 480.675,427.25 ; 479.725,427.25 480.675,427.25
  Bottom Layer w0.254: C3.1@438.616,421.385 C3.1@438.766,421.235 ; v1(454.125,400.575) 454.125,401.456 C12.1@454.359,401.69 ; v1(480.2,423.05) 480.2,421.824 C9.1
  Bottom Layer w0.4: C7.1 423.85,416.425 v1(423.85,418.025) 423.85,419.597 423.8,419.647 J5.2 J4.2 ; C3.1@438.616,421.385 C4.2@438.616,423.05 ; C3.1@438.766,421.235 U4.1 438.766,418.934 439.075,418.625 439.075,414.685 439.041,414.651 439.041,405.859 C1.2 ; v1(451.125,400.625) 451.125,401.631 C18.1 452.315,401.665 452.65,402 452.65,405.425 454.484,407.259 U3.2 C2.2@459.059,414.54 ; R3.1 466.025,446.3 J3.4 J3.8 J3.10 J3.12 478.795,447.3 487.6,447.3 ; U1.23 474.325,437.675 474.325,438.85 474.75,439.275 474.925,439.1 475.075,439.25 v1(476.125,439.25) ; U2.7 C8.2 C9.1 ; v1(476.625,427.8) 476.625,428.875 476.875,429.125 U1.12 ; v1(483.275,427.85) 483.35,427.925 483.35,428.89 483.375,428.915 U1.2 ; v1@483.35,427.9 489.125,427.9 ; C5.1 487.625,427.9 489.125,427.9 ; C15.2 488.025,446.875 ; R22.2 C13.1 490.725,427.65 ; R23.2 R27.2 495.775,436.1 495.7,436.025 497.9,436.025 C14.2 ; C17.1 500.525,432.3 C14.2 ; v1(501.525,430.475) 500.95,430.475 500.525,430.05 500.525,429.325 499.1,427.9 490.975,427.9 ; 487.6,447.3 488.025,446.875 ; 487.6,447.3 488.45,447.3 ; 488.025,446.875 488.45,447.3 ; 488.45,447.3 502.425,447.3 503.125,446.6 503.125,440.475 R18.1 503.075,434.85 C14.2 ; 489.125,427.9 489.975,427.9 ; 489.975,427.9 490.475,427.9 490.725,427.65 ; 489.975,427.9 490.975,427.9 ; 490.725,427.65 490.975,427.9
GPIO0: J6.4 U1.37 | length 70
  Top Layer w0.4: J6.4 424.765,444.635 427.825,441.575 431.756,441.575 441.806,431.525 470.725,431.525 472.125,432.925 479.05,432.925 480.925,434.8 481.2,434.525 v1(481.7,434.525)
  Bottom Layer w0.4: v1(481.7,434.525) 482.421,435.246 482.588,435.246 483.325,435.983 483.325,437.575 U1.37
GPIO1: J6.3 U1.36 | length 65.1
  Top Layer w0.4: J6.3 427.305,444.545 428.4,443.45 432.075,443.45 442.475,433.05 469.55,433.05 470.475,433.975 478.725,433.975 480.696,435.946 v1(482.299,435.946)
  Bottom Layer w0.4: v1(482.299,435.946) 482.299,436.007 482.725,436.433 U1.36
GPIO18: J6.1 U1.32 | length 53.4
  Top Layer w0.4: J6.1 432.75,446.875 442.75,436.875 470.775,436.875 471.75,435.9 v1(477.775,435.9)
  Bottom Layer w0.4: v1(477.775,435.9) 478.999,435.9 480.125,437.026 U1.32
GPIO19: J6.2 U1.33 | length 58.5
  Top Layer w0.4: J6.2 429.845,445.505 430.5,444.85 432.6,444.85 442.55,434.9 v1(478.325,434.9)
  Bottom Layer w0.4: v1(478.325,434.9) 479.242,434.9 480.775,436.433 U1.33
HIN: R8.2 U2.3 | length 2.1
  Bottom Layer w0.4: U2.3 471.959,421.815 472.109,421.965 472.109,423.29 R8.2@472.159,423.34
HO: D5.2 R12.1 U2.13 | length 5.3
  Bottom Layer w0.4: R12.1 468.009,414.298 468.401,414.69 D5.2 469.595,414.69 470.244,415.339 U2.13
I2C_SCL: J5.4 U1.15 | length 46.8
  Bottom Layer w0.4: J5.4 434.278,423.153 436.9,425.775 465.8,425.775 471.25,431.225 472.574,431.225 472.599,431.2 472.701,431.2 472.726,431.225 473.224,431.225 473.249,431.2 473.351,431.2 473.376,431.225 473.874,431.225 473.899,431.2 474.001,431.2 474.026,431.225 474.6,431.225 474.925,430.9 U1.15
I2C_SDA: J5.3 U1.14 | length 50.9
  Bottom Layer w0.4: J5.3 434.843,428.15 465.325,428.15 469.257,432.082 474.868,432.082 475.575,431.375 U1.14
LED_GREEN: R28.2 U1.5 | length 60.4
  Top Layer w0.4: v1(451.475,445.425) 451.125,445.775 451.125,448.975 452.275,450.125 482.3,450.125 486.5,445.925 v1(486.5,440.95)
  Bottom Layer w0.4: v1(451.475,445.425) R28.2 ; U1.5 481.425,432.025 482.25,432.85 482.9,432.85 486.5,436.45 v1(486.5,440.95)
LED_RED: R29.2 U1.6 | length 52.9
  Top Layer w0.4: v1(452.4,449.025) 452.725,449.35 481.25,449.35 485.45,445.15 v1(485.45,439.025)
  Bottom Layer w0.4: R29.2 v1(452.4,449.025) ; U1.6 480.775,432.375 485.45,437.05 v1(485.45,439.025)
LIN: R7.2 U2.1 | length 2.1
  Bottom Layer w0.4: R7.2 468.284,422.04 468.509,421.815 U2.1
LO: D6.2 R14.1 U2.9 | length 3.7
  Bottom Layer w0.254: U2.9@475.309,416.45 U2.9
  Bottom Layer w0.4: R14.1 D6.2 U2.9@475.309,416.45
NetC6_2: C6.2 U1.22 | length 2.1
  Bottom Layer w0.4: C6.2@472.8,439.174 C6.2@472.8,439.45 ; C6.2 473.625,438.85 U1.22
NetC7_2: C7.2 R5.1 R6.2 | length 6.3
  Bottom Layer w0.4: C7.2 425.4,414.05 425.7,413.75 R5.1 R6.2
NetC10_2: C10.2 D4.2 U2.14 | length 4
  Bottom Layer w0.4: D4.2 467.234,416.74 C10.2 467.984,416.765 468.284,416.465 U2.14
NetC18_2: C18.2 D1.2 U3.1 | length 20.2
  Bottom Layer w0.4: C18.2 451.059,404.215 451.059,417.506 449.309,419.256 D1.2 U3.1
NetD2_1: D2.1 R28.1 | length 2.3
  Top Layer w0.4: D2.1 454.3,445.425 v1(455.35,445.425)
  Bottom Layer w0.4: R28.1 v1(455.35,445.425)
NetD3_1: D3.1 R29.1 | length 2.2
  Top Layer w0.4: D3.1 454.275,447.925 v1(455.275,447.925)
  Bottom Layer w0.4: R29.1 454.175,447.925 v1(455.275,447.925)
NetD5_1: D5.1 R13.1 | length 1.9
  Bottom Layer w0.254: D5.1@466.059,414.665 D5.1
  Bottom Layer w0.4: R13.1 D5.1@466.059,414.665
NetD6_1: D6.1 R15.1 | length 1.9
  Bottom Layer w0.4: R15.1 D6.1
NetD7_1: D7.1 J2.1
NetJ3_13: J3.13 R1.1 | length 3.4
  Bottom Layer w0.4: J3.13 480.695,442.955 481.1,442.55 R1.1
NetJ3_14: J3.14 R2.1 | length 2.5
  Bottom Layer w0.4: J3.14 482.045,445.495 R2.1
NetQ1_1: Q1.1 R12.2 R13.2 | length 3.9
  Bottom Layer w0.4: R13.2 R12.2 Q1.1
NetQ2_1: Q2.1 R14.2 R15.2 | length 5.6
  Bottom Layer w0.254: Q2.1@478.209,409.39 479.034,409.39 Q2.1
  Bottom Layer w0.4: R14.2 R15.2 Q2.1@478.209,409.39
NetR4_2: R4.2 R5.2 | length 2.8
  Top Layer w0.4: R4.2 427.15,415.5 v1(427.15,416.85)
  Bottom Layer w0.4: R5.2 v1(427.15,416.85)
NetR6_1: R6.1 U1.34 | length 64.2
  Top Layer w0.4: v1(434.5,415.5) 434.625,415.5 436.275,417.15 436.275,419.75 441.45,424.925 465.2,424.925 467.8,427.525 468.9,427.525 469.975,428.6 470.3,428.6 473.5,431.8 478.025,431.8 v1(478.363,432.137)
  Bottom Layer w0.4: R6.1 v1(434.5,415.5) ; v1(478.363,432.137) 478.363,432.862 481.425,435.925 U1.34
NetR7_1: R7.1 U1.8 | length 14.5
  Bottom Layer w0.4: R7.1 468.284,426.134 v1(468.35,426.2) 469.075,426.925 475.235,426.925 475.335,426.825 475.915,426.825 476.015,426.925 476.94,426.925 479.475,429.46 U1.8
NetR8_1: R8.1 U1.7 | length 11.1
  Bottom Layer w0.4: R8.1 472.134,425.884 v1(472.2,425.95) 472.425,426.175 477.038,426.175 480.125,429.262 U1.7
NetR11_2: R11.2 U2.8
NetR19_1: R19.1 R20.2 | length 2
  Bottom Layer w0.4: R19.1 R20.2
NetR19_2: R19.2 R21.1 R22.1 | length 4
  Bottom Layer w0.254: R19.2 R19.2@492.725,422.125
  Bottom Layer w0.4: R21.1 490.8,422.125 R19.2
NetR25_1: R25.1 R26.1 U5.1 | length 3.5
  Bottom Layer w0.254: U5.1@491.57,436.025 U5.1@491.575,436.03
  Bottom Layer w0.4: U5.1@491.575,436.03 R25.1 R26.1
PANEL+_IN: C14.1 C17.2 D7.2 L1.2 R20.1 TP3.0 | length 11.2
  Top Layer w0.4: TP3.0 482.55,417.2 485.7,420.35
  Bottom Layer w0.4: v1(494.675,421.15) R20.1 ; v1(496.925,430.525) 497.925,430.525 C17.2
PANEL-: J2.2 R18.2 R24.2 | length 7.3
  Bottom Layer w0.4: R24.2 494.5,441.55 R18.2@497.425,441.55
  Bottom Layer w0.508: J2.2 497.425,442.55 497.425,441.55 R18.2 R18.2@497.625,440.625
SD': R9.2 U2.2 | length 1.5
  Bottom Layer w0.254: R9.2@470.234,423.34 R9.2@470.244,423.33
  Bottom Layer w0.4: U2.2 R9.2@470.244,423.33
TCK: J3.9 J3.11 U1.31 | length 8.9
  Bottom Layer w0.4: J3.9 J3.11 479.475,440.47 U1.31
TDI: J3.3 U1.28 | length 14.5
  Bottom Layer w0.4: J3.3 466.83,442.245 468.52,440.555 476.57,440.555 477.525,439.6 U1.28
TDO: J3.7 U1.30 | length 10.7
  Bottom Layer w0.4: J3.7 473.11,441.755 477.341,441.755 478.825,440.271 U1.30
TMS: J3.1 U1.29 | length 19.3
  Bottom Layer w0.4: J3.1 465.61,444.275 467.207,444.275 468.03,443.452 468.03,442.32 469.195,441.155 477.093,441.155 478.175,440.073 U1.29
TOGGLE_SW_IN: S1.2 U1.27 | length 35
  Top Layer w0.4: 443.825,438.525 471.75,438.525 473.2,437.075 476.525,437.075 v1(476.975,436.625)
  Bottom Layer w0.4: U1.27 476.875,436.725 v1(476.975,436.625)
TRST': J3.2 R3.2 U1.16 | length 44.8
  Top Layer w0.4: J3.2 462.375,443.58 462.375,442.25 464.375,440.25 472.125,440.25 474.125,438.25 481.325,438.25 483.225,436.35 483.225,434.625 479.375,430.775 474.65,430.775 473.95,430.075 v1(473.95,429.025)
  Bottom Layer w0.4: R3.2 464.275,445.51 J3.2 ; v1(473.95,429.025) 474.275,429.35 U1.16
UART_RX: J4.3 U1.10 | length 51.4
  Bottom Layer w0.4: J4.3 431.693,432.907 431.8,432.8 463.775,432.8 464.771,433.796 475.304,433.796 478.175,430.925 U1.10
UART_TX: J4.4 U1.13 | length 47.5
  Bottom Layer w0.4: J4.4 433.446,430 464.35,430 467.289,432.939 475.097,432.939 476.225,431.811 U1.13
V_BATT: C1.1 C11.2 C12.2 D1.1 J1.2 Q1.2 | length 13
  Top Layer w0.4: v1(449.325,415.15) 449.325,410.882 449.309,410.866 449.825,410.35 449.625,410.15 448.65,410.15 449.275,410.775 449.35,410.7 449.35,410.4
  Bottom Layer w0.254: v1(454.15,405.225) 454.15,404.739 C12.2@454.649,404.24 ; Q1.2@459.339,408.1 459.784,408.1 461.859,408.1 Q1.2@461.861,408.1
  Bottom Layer w0.4: D1.1 449.325,416.874 v1(449.325,415.15)
  other v1: 459.184,404.175 459.784,404.175 460.384,404.175 460.984,404.175 461.584,404.175 462.184,404.175 462.784,404.175 463.384,404.175 463.984,404.175 464.584,404.175 459.484,404.7 460.084,404.7 460.684,404.7 461.284,404.7 461.884,404.7 462.484,404.7 463.084,404.7 463.684,404.7 464.284,404.7 459.184,405.225 459.784,405.225 460.384,405.225 460.984,405.225 461.584,405.225 462.184,405.225 462.784,405.225 463.384,405.225 463.984,405.225 464.584,405.225 459.484,405.75 460.084,405.75 460.684,405.75 461.284,405.75 461.884,405.75 462.484,405.75 463.084,405.75 463.684,405.75 464.284,405.75 459.184,406.275 459.784,406.275 460.384,406.275 460.984,406.275 461.584,406.275 462.184,406.275 462.784,406.275 463.384,406.275 463.984,406.275 464.584,406.275 459.484,406.8 460.084,406.8 460.684,406.8 461.284,406.8 461.884,406.8 462.484,406.8 463.084,406.8 463.684,406.8 464.284,406.8 459.184,407.325 459.784,407.325 460.384,407.325 460.984,407.325 461.584,407.325 462.184,407.325 462.784,407.325 463.384,407.325 463.984,407.325 464.584,407.325 459.484,407.85 460.084,407.85 460.684,407.85 461.284,407.85 461.884,407.85 462.484,407.85 463.084,407.85 463.684,407.85 464.284,407.85 459.184,408.375 459.784,408.375 460.384,408.375 460.984,408.375 461.584,408.375 462.184,408.375 462.784,408.375 463.384,408.375 463.984,408.375 464.584,408.375 459.484,408.9 460.084,408.9 460.684,408.9 461.284,408.9 461.884,408.9 462.484,408.9 463.084,408.9 463.684,408.9 464.284,408.9 459.184,409.425 459.784,409.425 460.384,409.425 460.984,409.425 461.584,409.425 462.184,409.425 462.784,409.425 463.384,409.425 463.984,409.425 464.584,409.425
VOLTAGE_SENSOR: C13.2 R21.2 U1.19 | length 21.9
  Top Layer w0.4: v1(475.625,427.525) 477.475,425.675 v1(478.575,425.675)
  Bottom Layer w0.4: U1.19 472.325,428.125 472.925,427.525 v1(475.625,427.525) ; v1(478.575,425.675) C13.2 488.75,425.3 R21.2
VS: C10.1 L1.1 Q1.3 Q2.2 U2.12 | length 18.7
  Top Layer w0.4: v1@468.109,404.725 468.109,411.49 v1(471.509,414.89)
  Bottom Layer w0.254: Q2.2@470.259,404.275 Q2.2@470.309,404.325 ; v1(471.509,414.89) v1@471.514,414.895
  Bottom Layer w0.4: C10.1 470.306,418.365 471.514,417.157 U2.12 v1@471.514,414.895
  other v1: 466.809,404.225 467.409,404.225 468.009,404.225 468.609,404.225 469.209,404.225 470.434,404.275 471.034,404.275 471.634,404.275 472.234,404.275 472.834,404.275 473.434,404.275 474.034,404.275 474.634,404.275 475.234,404.275 475.834,404.275 467.109,404.75 467.709,404.75 468.309,404.75 468.909,404.75 470.734,404.8 471.334,404.8 471.934,404.8 472.534,404.8 473.134,404.8 473.734,404.8 474.334,404.8 474.934,404.8 475.534,404.8 470.434,405.325 471.034,405.325 471.634,405.325 472.234,405.325 472.834,405.325 473.434,405.325 474.034,405.325 474.634,405.325 475.234,405.325 475.834,405.325 470.734,405.85 471.334,405.85 471.934,405.85 472.534,405.85 473.134,405.85 473.734,405.85 474.334,405.85 474.934,405.85 475.534,405.85 470.434,406.375 471.034,406.375 471.634,406.375 472.234,406.375 472.834,406.375 473.434,406.375 474.034,406.375 474.634,406.375 475.234,406.375 475.834,406.375 470.734,406.9 471.334,406.9 471.934,406.9 472.534,406.9 473.134,406.9 473.734,406.9 474.334,406.9 474.934,406.9 475.534,406.9 470.434,407.425 471.034,407.425 471.634,407.425 472.234,407.425 472.834,407.425 473.434,407.425 474.034,407.425 474.634,407.425 475.234,407.425 475.834,407.425 470.734,407.95 471.334,407.95 471.934,407.95 472.534,407.95 473.134,407.95 473.734,407.95 474.334,407.95 474.934,407.95 475.534,407.95 470.434,408.475 471.034,408.475 471.634,408.475 472.234,408.475 472.834,408.475 473.434,408.475 474.034,408.475 474.634,408.475 475.234,408.475 475.834,408.475 470.734,409 471.334,409 471.934,409 472.534,409 473.134,409 473.734,409 474.334,409 474.934,409 475.534,409 470.434,409.525 471.034,409.525 471.634,409.525 472.234,409.525 472.834,409.525 473.434,409.525 474.034,409.525 474.634,409.525 475.234,409.525 475.834,409.525
VSL: Q2.3 R16.2 | length 14.1
  Bottom Layer w0.254: Q2.3@479.359,404.825 Q2.3@480.434,404.825
  Bottom Layer w0.4: 476.594,416.465 478.234,416.465 ; 480.112,414.587 481.038,414.587 481.211,414.414 481.211,405.111 480.925,404.825 Q2.3@480.434,404.825
  other v1: 478.059,404.325 478.659,404.325 479.259,404.325 479.859,404.325 480.459,404.325 478.359,404.85 478.959,404.85 479.559,404.85 480.159,404.85
pads on no net: S1.0 U1.9 U1.17 U1.21 U1.35 U1.38 U2.10 U2.11 U5.5 U5.6 U5.7

## Polygon pours and split planes (outlines as drawn)
GND on Top Layer "COM_VCC" (solid, pour order 25): 501.45,395.45 506.75,400.75 506.75,446.45 505.75,447.45 500.75,447.45 499.75,446.45 499.75,406.45 497.75,404.45 486.75,404.45 484.8,402.5 424.869,402.5 423.325,402.5 422.3,403.675 422.3,396.425 423.275,395.45
V_BATT on Top Layer "Top_Layer_V_Batt" (solid, pour order 19): 424.234,404.515 425.234,403.515 465.234,403.515 465.734,404.015 465.734,410.015 465.234,410.515 425.234,410.515 424.234,409.515
PANEL- on Top Layer "Top_Layer_Ind_Switches" (solid, pour order 13): 498.75,436.45 498.75,446.45 497.75,447.45 494.75,447.45 493.75,446.45 493.75,436.45 494.75,435.45 497.75,435.45
VS on Top Layer "Top_Layer_Ind_Switches" (solid, pour order 7): 487.25,405.45 485.75,405.45 484.75,406.45 477.75,406.45 476.75,405.45 476.75,404.2 476,403.45 470.25,403.45 469.75,403.95 469.75,409.675 470.25,410.175 479.475,410.175 481.75,412.45 481.75,414.45 485.75,418.45 497.75,418.45 498.75,417.45 498.75,406.45 497.75,405.45
NetD7_1 on Top Layer "Top_Layer_Ind_Switches" (solid, pour order 15): 491.825,435.45 492.825,436.45 492.825,446.45 491.825,447.45 488.825,447.45 487.825,446.45 487.825,436.45 488.825,435.45
VSL on Top Layer "Q2_3" (solid, pour order 29): 484.734,405.015 484.734,403.515 484.234,403.015 477.734,403.015 477.234,403.515 477.234,405.015 477.734,405.515 484.234,405.515
PANEL+_IN on Top Layer "Top_Layer_Ind_Switches" (solid, pour order 9): 485.75,419.45 484.75,420.45 484.75,433.45 485.75,434.45 493.75,434.45 497.75,434.45 498.75,433.45 498.75,431.45 498.75,420.45 497.75,419.45
VS on Bottom Layer "C10_1" (solid, pour order 33): 470.675,407.675 468.775,407.675 466.234,405.134 466.234,404.015 466.734,403.515 469.69,403.515 470.675,404.5

## Silkscreen, mask and mechanical layers (free items; w line width, h text height)
Top Overlay:
  drawing of 16 lines, arcs and shapes, not listed
  text "PANEL" at 490.025,451.55 h1.52
  text "+  -" at 490.5,449.275 h1.52
  text "1" at 462,438.1 h1
  text "3V3" at 425.175,433.3 h1 r90
  text "GND" at 427.767,433.3 h1 r90
  text "RX" at 430.358,433.3 h1 r90
  text "TX" at 432.95,433.3 h1 r90
  text "3V3" at 425.175,425.325 h1 r90
  text "GND" at 427.767,425.325 h1 r90
  text "SDA" at 430.358,425.325 h1 r90
  text "SCL" at 432.95,425.325 h1 r90
  text "GND" at 477.125,420.725 h0.76
  text "Hedgehog" at 442.947,417.44 h3.81
  text "+3V3" at 468.125,414.65 h0.76
  text "+15V" at 472.45,414.65 h0.76
  text "+PANEL" at 476.1,414.65 h0.76
  text "Note" at 442.947,414.44 h2.03
  text "BATTERY" at 422.95,394.075 h1.52
Mechanical 1:
  the board outline again, w0.4

## Dimensions
419.5,384.5 to 509.5,384.5 on Mechanical 2
419.5,459.5 to 419.5,384.5 on Mechanical 2

## Text inside footprints (layer, text, board x,y; h text height)
C1: Mechanical 15 "'Designator'" at 446.963,405.477 h0.5 r270